# Altium PCB PCB1 Regulator V2.PcbDoc
Units mil, origin at the board's own origin, x right, y up, seen from the top; angles counter-clockwise.
Board outline 6000 x 4000 mil, 2 copper layers (Top Layer, Bottom Layer); 5 components, 9 nets, 28 pads, 0 vias.
Unrouted connection lines stored in the file: 11.
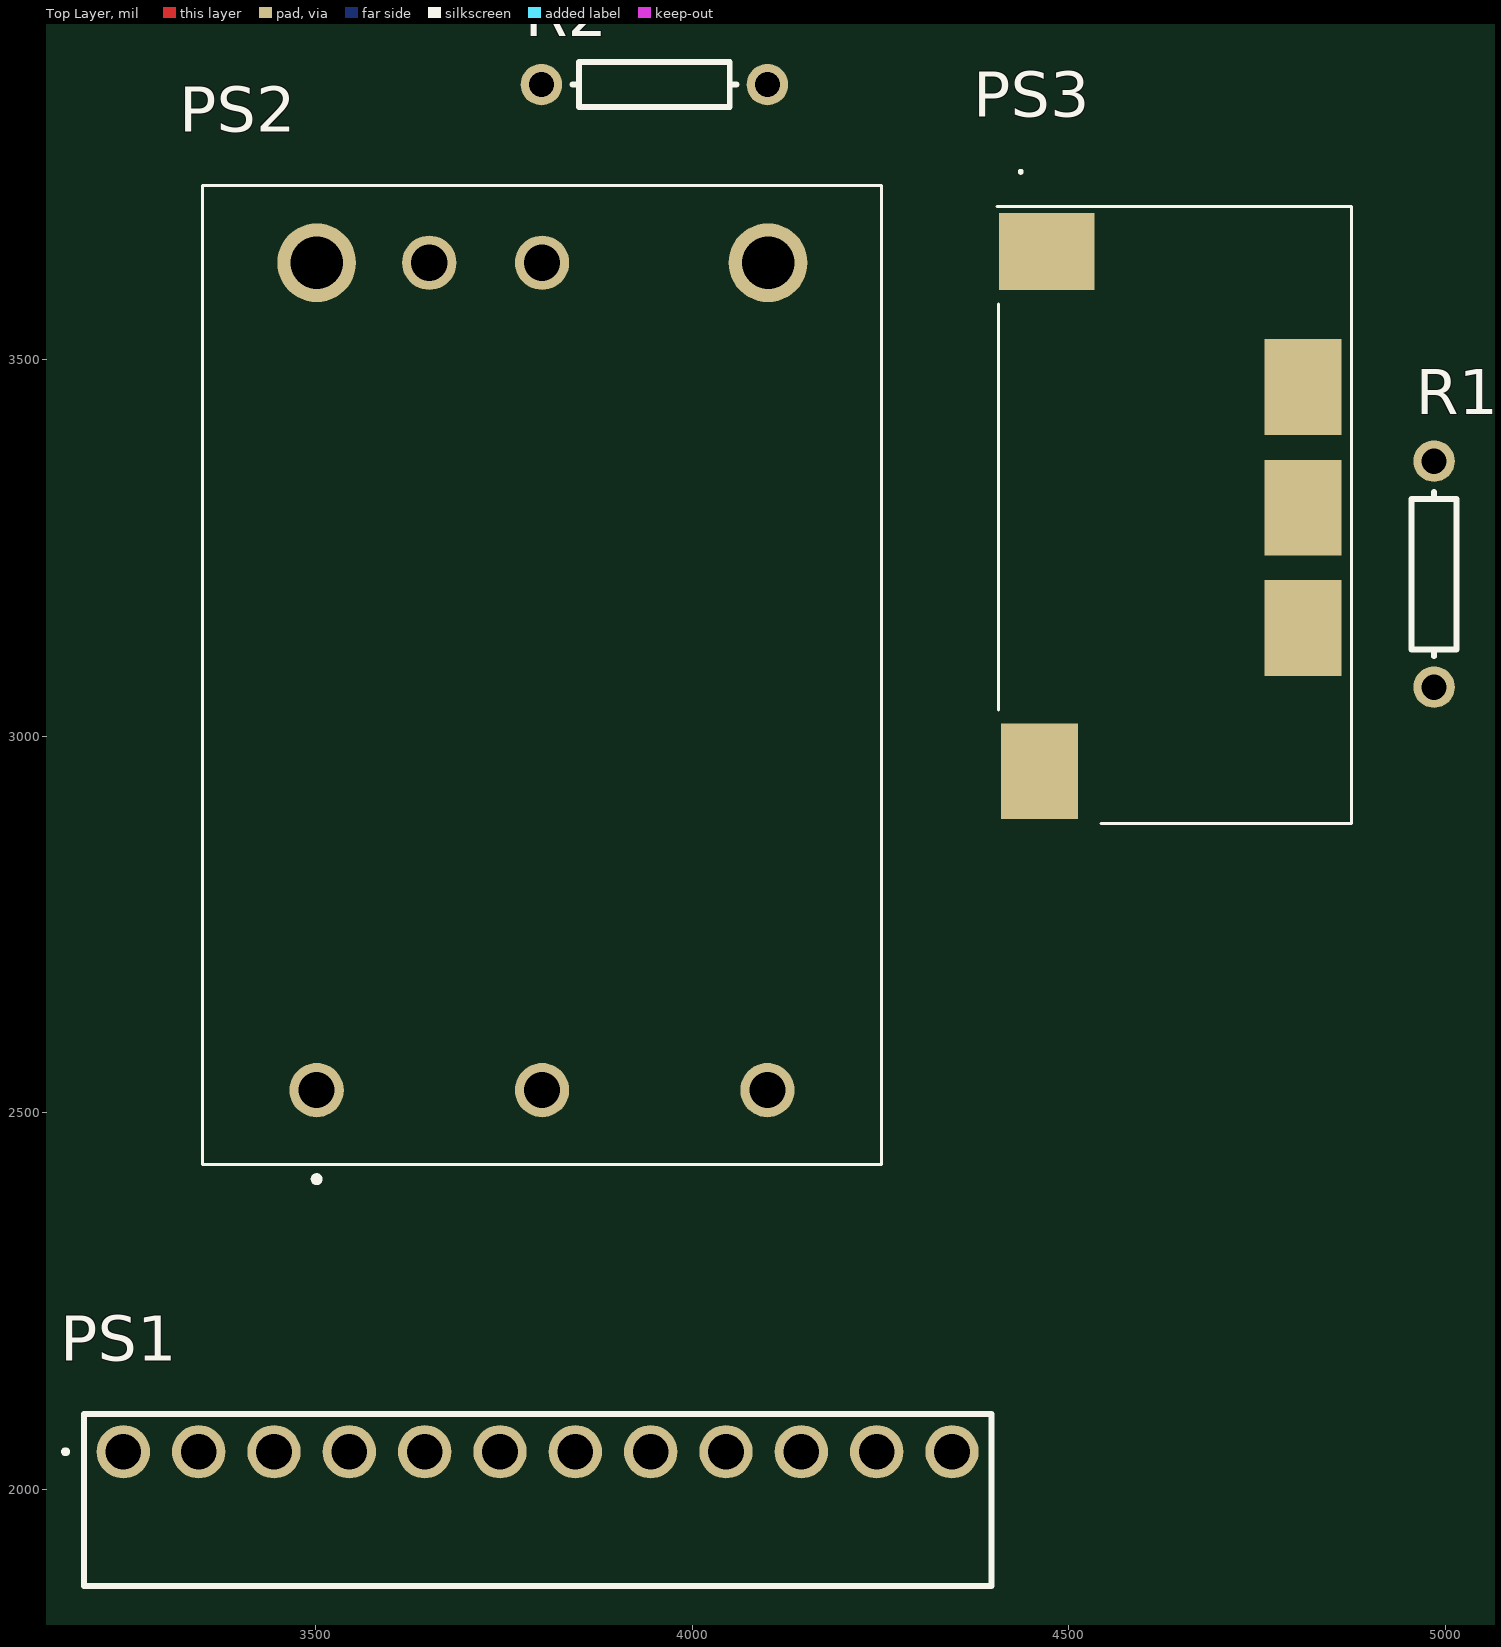
[diagram p0: Top Layer view]
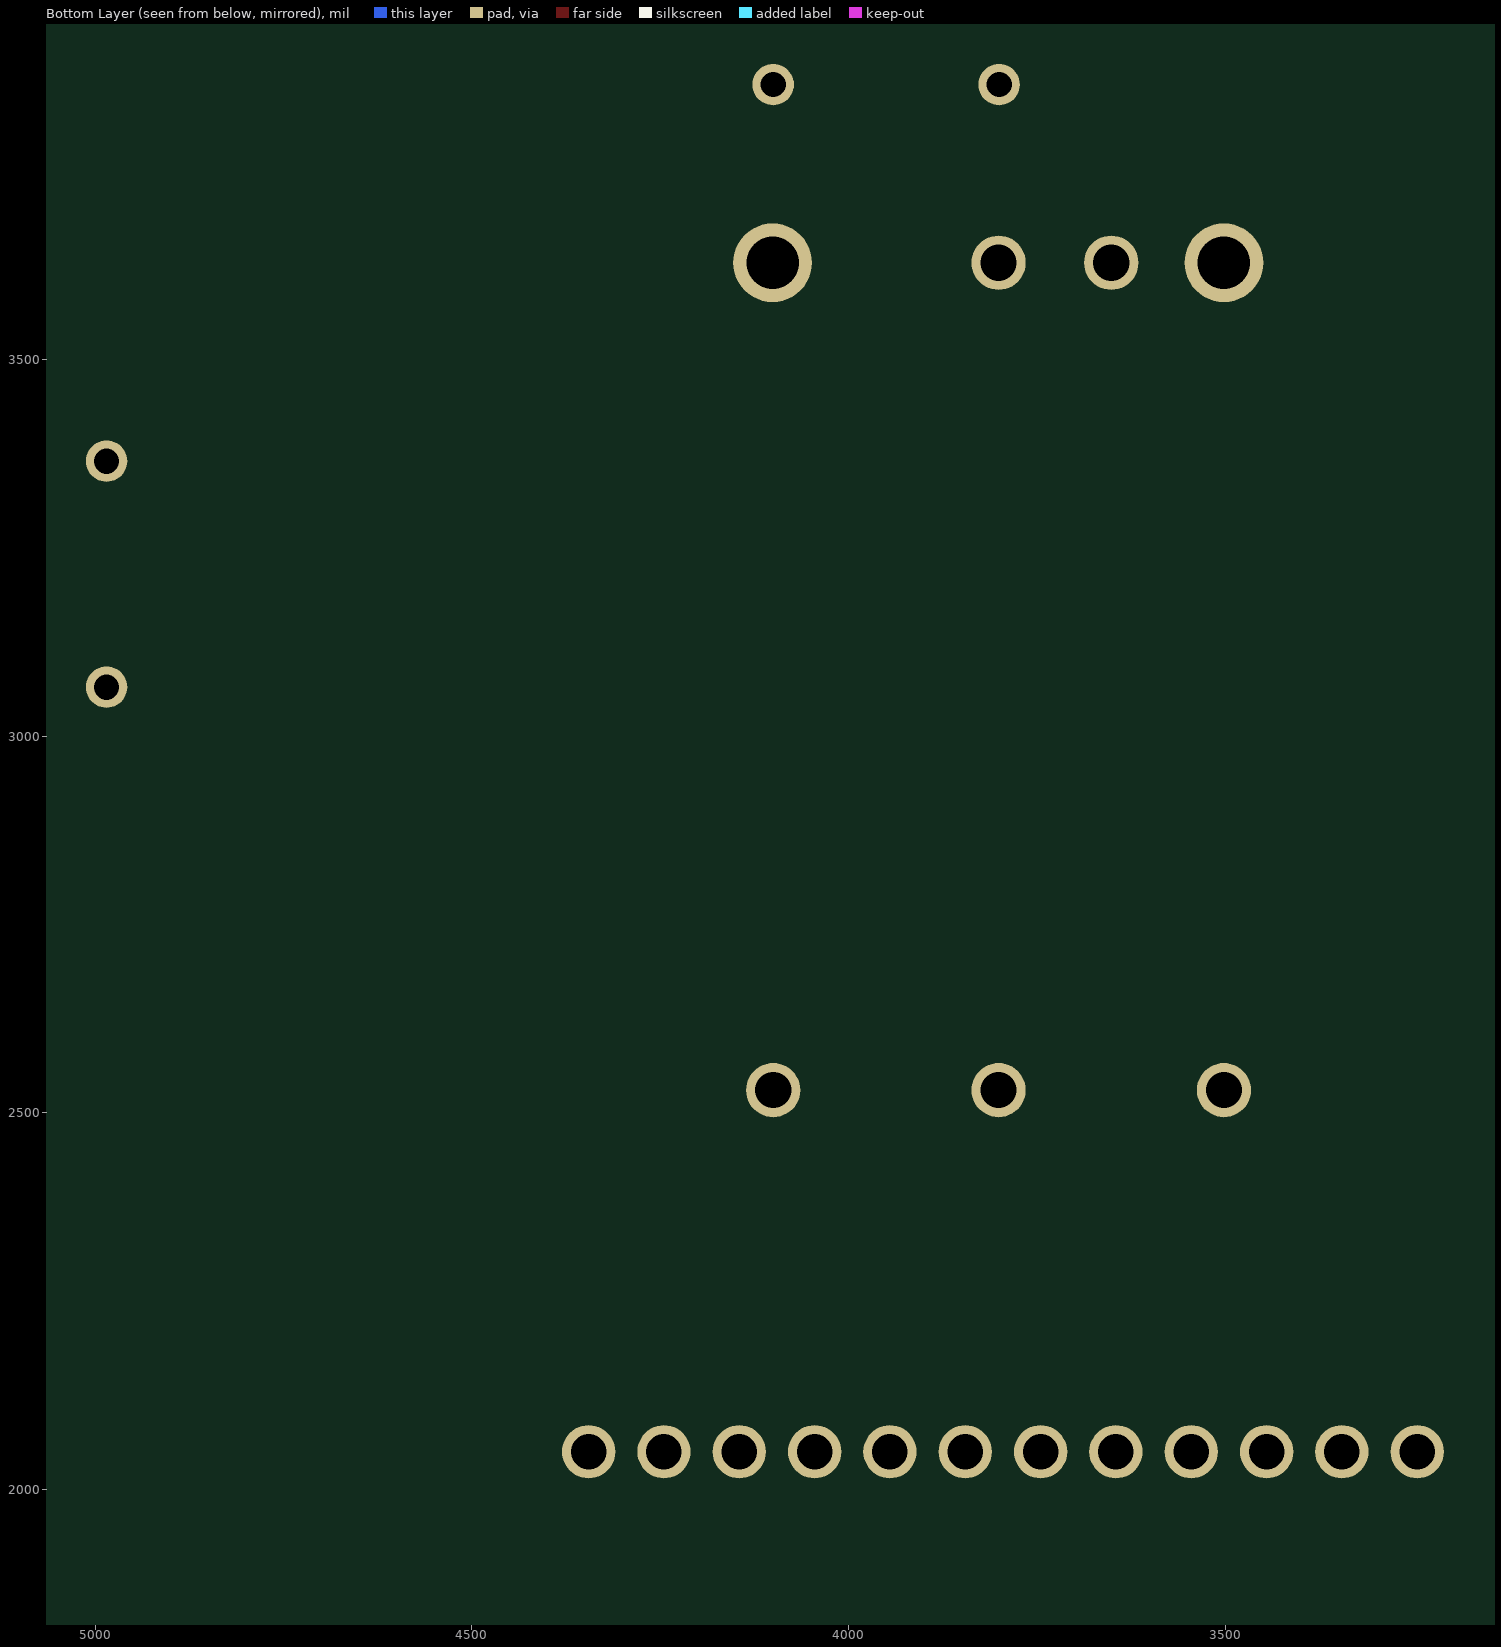
[diagram p1: Bottom Layer view, seen from below]

## Layer stack, top to bottom
Top Solder: solder mask 0.4, Solder Resist, Dk 3.5
Top Layer: signal copper 1.4
Dielectric 1: dielectric 12.6, FR-4, Dk 4.8
Bottom Layer: signal copper 1.4
Bottom Solder: solder mask 0.4, Solder Resist, Dk 3.5

## Board outline
1000,1000 7000,1000 7000,5000 1000,5000

## Design rules (kind name [scope] priority, off if disabled: settings)
Clearance [All] p1: gap=10 ignorepadtopadclearanceinfootprint=FALSE except(0: Arc-Hole Track-Hole SMDPad-Hole THPad-Hole Via-Hole Fill-Hole Poly-Hole Region-Hole Text-Hole)
PolygonConnect [All] p1: connectstyle=Relief reliefconductorwidth=10 reliefentries=4 polygonreliefangle="90 Angle" airgapwidth=10
RoutingVias [All] p1: holewidth=28 width=50 viastyle="Through Hole" minholewidth=28 minwidth=50 maxholewidth=28 maxwidth=50
SolderMaskExpansion [All] p1: expansion=4 istentingtop=FALSE
Width [All] p1: maxlimit=10 minlimit=10 preferedwidth=10
30 further rules are at their usual default settings.

## Components (designator, comment, footprint, x,y, rotation, side; value= is the part's Value field where it differs from the comment)
PS1 "P783F-Q24-S12-S" P783FQ24S12S 3245,2050 r0 top
PS2 "I6A24014A033V-001-R" I6A24014A033V001R 3501.57,2530 r90 top
PS3 "OKI-T_36W-W40N-C" OKIT36WW40NC 4640,3320 r90 top
R1 "Res1" AXIAL-0.3 4985,3215 r90 top value=4.3K
R2 "Res1" AXIAL-0.3 3950,3865 r0 top value=0.43K

## Footprints (in the part's own frame and the unit in brackets; to place one, negate y for a bottom-side part, rotate by r counter-clockwise, add the part's x,y. Pads: shape width x height; smd on the part's side, far side on the other; paste and mask are expansions set on the pad)
AXIAL-0.3 [mm] "Axial Device, Thru-Hole; 2 Leads; 0.3 in Pin Spacing"
  round 1.4 hole 0.85: 1(-3.81,0) 2(3.81,0)
  silkscreen extent -2.77,-0.76 2.77,0.76
I6A24014A033V001R [mm]
  round 1.83 hole 1.22: 1(0,0) 2(0,-7.6) 3(0,-15.2) 6(27.9,-7.6) 7(27.9,-3.8)
  round 2.655 hole 1.77: 4(27.9,-15.22) 8(27.9,0)
  silkscreen extent -3.1,-19.05 30.5,3.85, body extent -2.5,-19.05 30.5,3.85, height 12.2
OKIT36WW40NC [mm]
  rect 2.6x3.23 smd: 1(8.21,4.295)
  rect 3.23x2.6 smd: 2(-9.31,4.545) 3(-4.48,-4.345) 4(-0.43,-4.345) 5(3.64,-4.345)
  silkscreen extent -11.07,-5.97 10.95,5.97, body extent -11.07,-5.97 9.73,5.92, height 9.1
P783FQ24S12S [mm]
  round 1.8 hole 1.2: 1(0,0) 2(2.54,0) 3(5.08,0) 4(7.62,0) 5(10.16,0) 6(12.7,0) 7(15.24,0) 8(17.78,0) 9(20.32,0) 10(22.86,0) 11(25.4,0) 12(27.94,0)
  silkscreen extent -2,-4.53 29.27,1.27, body extent -1.33,-4.53 29.27,1.27, height 13.1

## Part data
PS1: "Power Supply", Manufacturer_Name="CUI Inc.", Datasheet Link=https://www.cui.com/product/resource/p783f-s.pdf, Height=13mm, Manufacturer_Part_Number=P783F-Q24-S12-S
PS2: "Power Supply", Manufacturer_Name=TDK, Mouser2 Part Number=967-I6A24014A033V001, Datasheet Link=https://componentsearchengine.com//I6A24014A033V-001-R.pdf, Height=12.1mm, Manufacturer_Part_Number=I6A24014A033V-001-R, Mouser2 Price/Stock=https://www.mouser.com/Search/Refine.aspx?Keyword=967-I6A24014A033V001
PS3: "Power Supply", Manufacturer_Name="Murata Electronics", Manufacturer_Part_Number=OKI-T/36W-W40N-C, Mouser2 Part Number=580-OKI-T/36W-W40N-C, Datasheet Link=https://componentsearchengine.com//OKI-T_36W-W40N-C.pdf, Height=9mm, Mouser2 Price/Stock=https://www.mouser.com/Search/Refine.aspx?Keyword=580-OKI-T%2F36W-W40N-C
R1 R2: "Resistor", LatestRevisionDate=17-Jul-2002, LatestRevisionNote="Re-released for DXP Platform.", PackageDescription="Axial Device, Thru-Hole; 2 Leads; 0.3 in Pin Spacing", PackageReference=AXIAL-0.3, Published=8-Jun-2000, Publisher="Altium Limited"

## Nets (pads, with @x,y where several pads share a name; then routed paths per layer and width w, separated by ;. In a path a pad name is that pad's centre, name@x,y a point inside that pad or via, vN(x,y) a via of type N, cw(c..) or ccw(c..) an arc to the next point about the centre after c; other vN are vias at no path point)
NetPS2_4: PS2.4 R2.2
NetPS2_6: PS2.6 R2.1
NetPS3_3: PS3.3 R1.1
NetPS3_4: PS3.4 R1.2
VCC: PS1.2 PS1.5 PS1.6 PS1.7 PS1.8 PS2.1 PS2.3 PS3.2
VCC_5V: 
VCC_7V: PS3.5
VCC_12V: PS1.9
VCC_24V: PS2.8
pads on no net: PS1.1 PS1.3 PS1.4 PS1.10 PS1.11 PS1.12 PS2.2 PS2.7 PS3.1